# EAGLE board kotiheating-arduino (EAGLE 7.7.0)
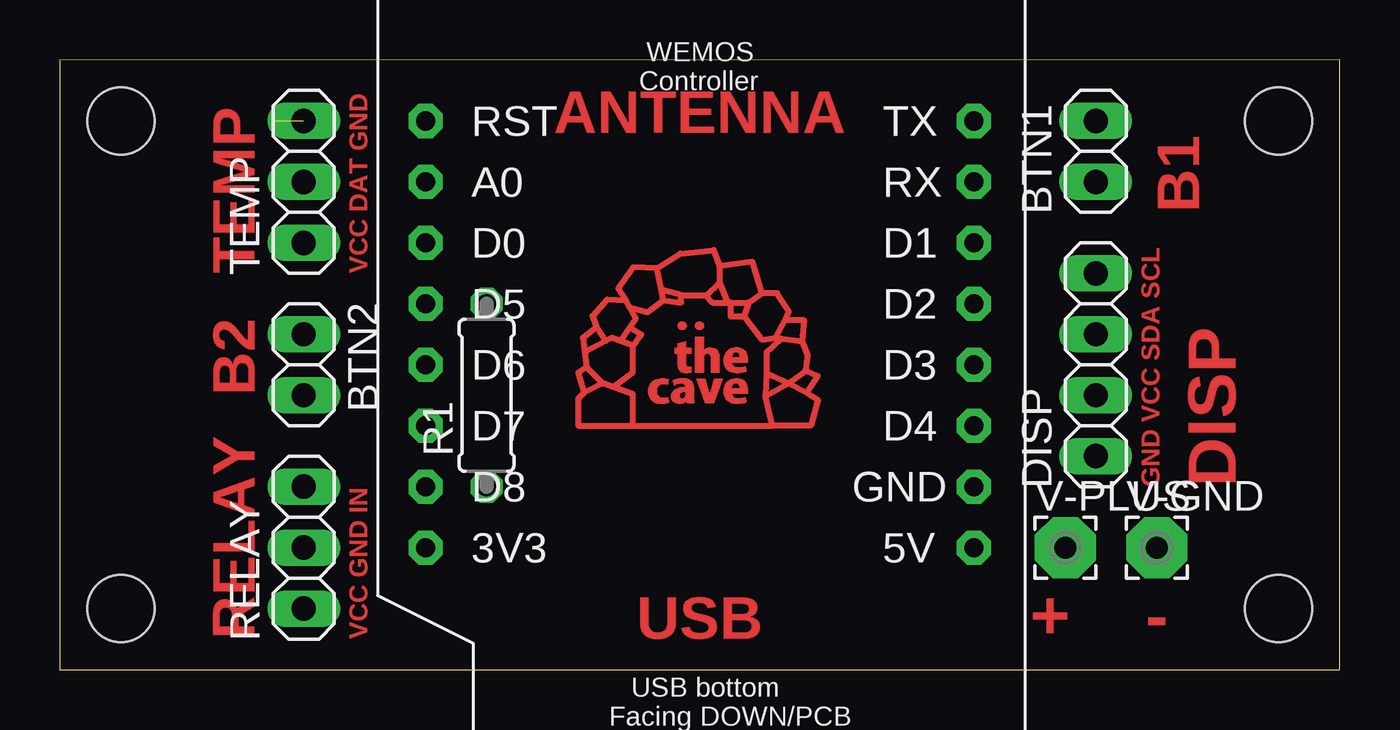
[diagram p0: board, top side]
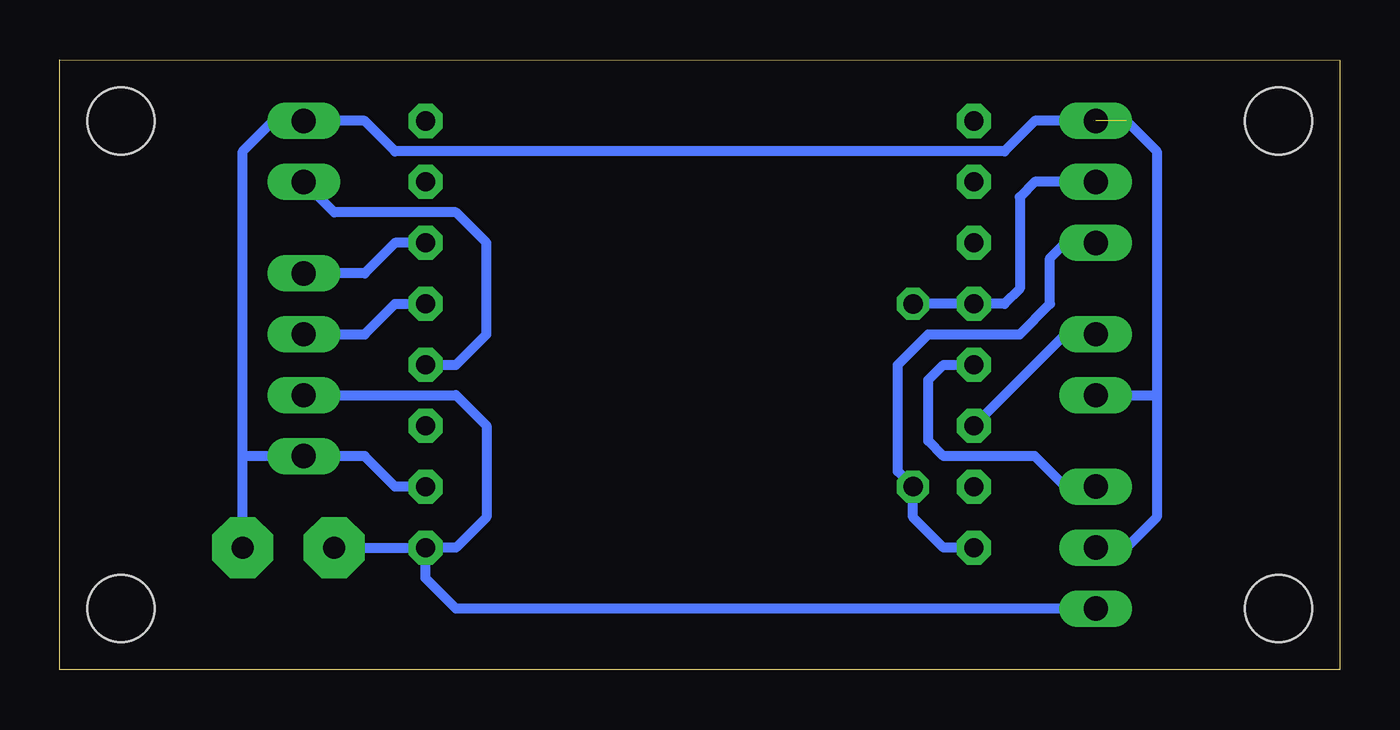
[diagram p1: board, bottom side, seen from below]

Size 53.34 x 25.4 mm. Coordinates in mm from the lower left corner, seen from the top.
Outline: 0,0 53.34,0 53.34,25.4 0,25.39 0,0
Copper layers (1*16): Top 0.035mm / dielectric 1.5mm / Bottom 0.035mm
Design rules "default": minimum track width 10mil, minimum drill 24mil, track to track 10mil, track to pad 10mil, pad to pad 10mil, via to via 10mil, smd to smd 10mil, copper to edge 24mil, drill to drill 16mil, minimum pad ring 10mil, minimum via ring 8mil, stop-mask expansion 4mil, vias tented up to drill 0mil, thermal gap 10mil
Holes 2.8 mm at 2.54,2.54 2.54,22.86 50.8,22.86 50.8,2.54

## Footprints (pad centres in the part's own frame; a part is rotated, then mirrored left to right if it is on the bottom)
1X02 = drill 1.016 long: 1 -1.27,0; 2 1.27,0
1X04 = drill 1.016 long: 1 -3.81,0; 2 -1.27,0; 3 1.27,0; 4 3.81,0
0207/7 = drill 0.813 octagon: 1 -3.81,0; 2 3.81,0
1X03 = drill 1.016 long: 1 -2.54,0; 2 0,0; 3 2.54,0
WEMOS = drill 0.8 pad 1.422 octagon: 3V3 0,0; 5V 22.86,0; A0 0,15.24; D0 0,12.7; D1 22.86,12.7; D2 22.86,10.16; D3 22.86,7.62; D4 22.86,5.08; D5 0,10.16; D6 0,7.62; D7 0,5.08; D8 0,2.54; GND 22.86,2.54; RST 0,17.78; RX 22.86,15.24; TX 22.86,17.78
2,54/0,9 = drill 0.914 pad 2.54 octagon: 1 0,0

## Placement (x,y rotation side)
BTN1  [1X02]  43.18,21.59 90 top
BTN2  [1X02]  10.16,12.7 270 top
DISP  [1X04]  43.18,12.7 90 top
R1  2k2  [0207/7]  17.78,11.43 90 top
RELAY  [1X03]  10.16,5.08 90 top
TEMP  [1X03]  10.16,20.32 90 top
U$1  WEMOS  [WEMOS]  15.24,5.08 0 top
U$2  THECAVE_LOGO_COPPER_SMALL  [LOGO_COPPER_SMALL]  21.59,10.16 0 top
V-GND  [2,54/0,9]  45.72,5.08 0 top
V-PLUS  [2,54/0,9]  41.91,5.08 0 top

## Library data of the parts
BTN1 BTN2 DISP RELAY TEMP = pinhead
R1 = rcl
U$1 = d1-mini
U$2 = thecave
V-GND V-PLUS = wirepad

## Nets
+3V3: R1.1 TEMP.1 U$1.3V3
+5V: DISP.2 RELAY.1 U$1.5V V-PLUS.1
BTN1: BTN1.1 U$1.D3
BTN2: BTN2.1 U$1.D7
GND: BTN1.2 BTN2.2 DISP.1 RELAY.2 TEMP.3 U$1.GND V-GND.1
RELAY: RELAY.3 U$1.D6
SCL: DISP.4 U$1.D1
SDA: DISP.3 U$1.D2
TEMP_DATA: R1.2 TEMP.2 U$1.D5

## Tracks (layer width: path | path; a pad name or v marks a point on that pad's centre or on a via)
+3V3
  Bottom 0.406: U$1.3V3 16.51,5.08 17.78,6.35 R1.1 18.41,8.26 18.41,12.7 17.14,13.97 13.34,13.97 12.06,15.24 12.06,17.14 11.43,17.78 TEMP.1
+5V
  Bottom 0.406: V-PLUS.1 U$1.5V | DISP.2 36.83,11.43 35.56,10.16 35.56,6.35 36.83,5.08 U$1.5V | RELAY.1 36.83,2.54 38.1,3.81 U$1.5V
BTN1
  Bottom 0.406: U$1.D3 36.83,12.7 35.56,13.97 35.56,17.78 36.83,19.05 41.91,19.05 BTN1.1
BTN2
  Bottom 0.406: BTN2.1 11.43,13.97 U$1.D7
GND  (1 unrouted)
  Bottom 0.406: V-GND.1 45.72,8.89 | 45.72,8.89 45.72,21.59 44.45,22.86 BTN1.2 40.64,22.86 39.37,21.59 13.97,21.59 12.7,22.86 TEMP.3 | 45.72,8.89 DISP.1 40.64,8.89 39.37,7.62 U$1.GND | 8.89,22.86 7.62,21.59 7.62,11.43 | 7.62,11.43 7.62,6.35 8.89,5.08 RELAY.2 | BTN2.2 7.62,11.43
RELAY
  Bottom 0.406: RELAY.3 11.43,7.62 12.7,8.89 16.51,8.89 17.14,9.53 17.14,12.06 16.51,12.7 U$1.D6
SCL
  Bottom 0.406: U$1.D1 39.37,17.78 40.64,16.51 DISP.4
SDA
  Bottom 0.406: DISP.3 40.64,13.97 39.37,15.24 U$1.D2
TEMP_DATA
  Bottom 0.406: TEMP.2 12.7,20.32 13.34,19.68 13.34,15.88 13.97,15.24 U$1.D5 R1.2

## Text on the board
Top: ANTENNA | B1 | TEMP | VCC DAT GND | B2 | GND VCC SDA SCL | DISP | RELAY | VCC GND IN | USB | + | -